# EAGLE board Old Shutters Signal Interface (EAGLE 9.0.0)
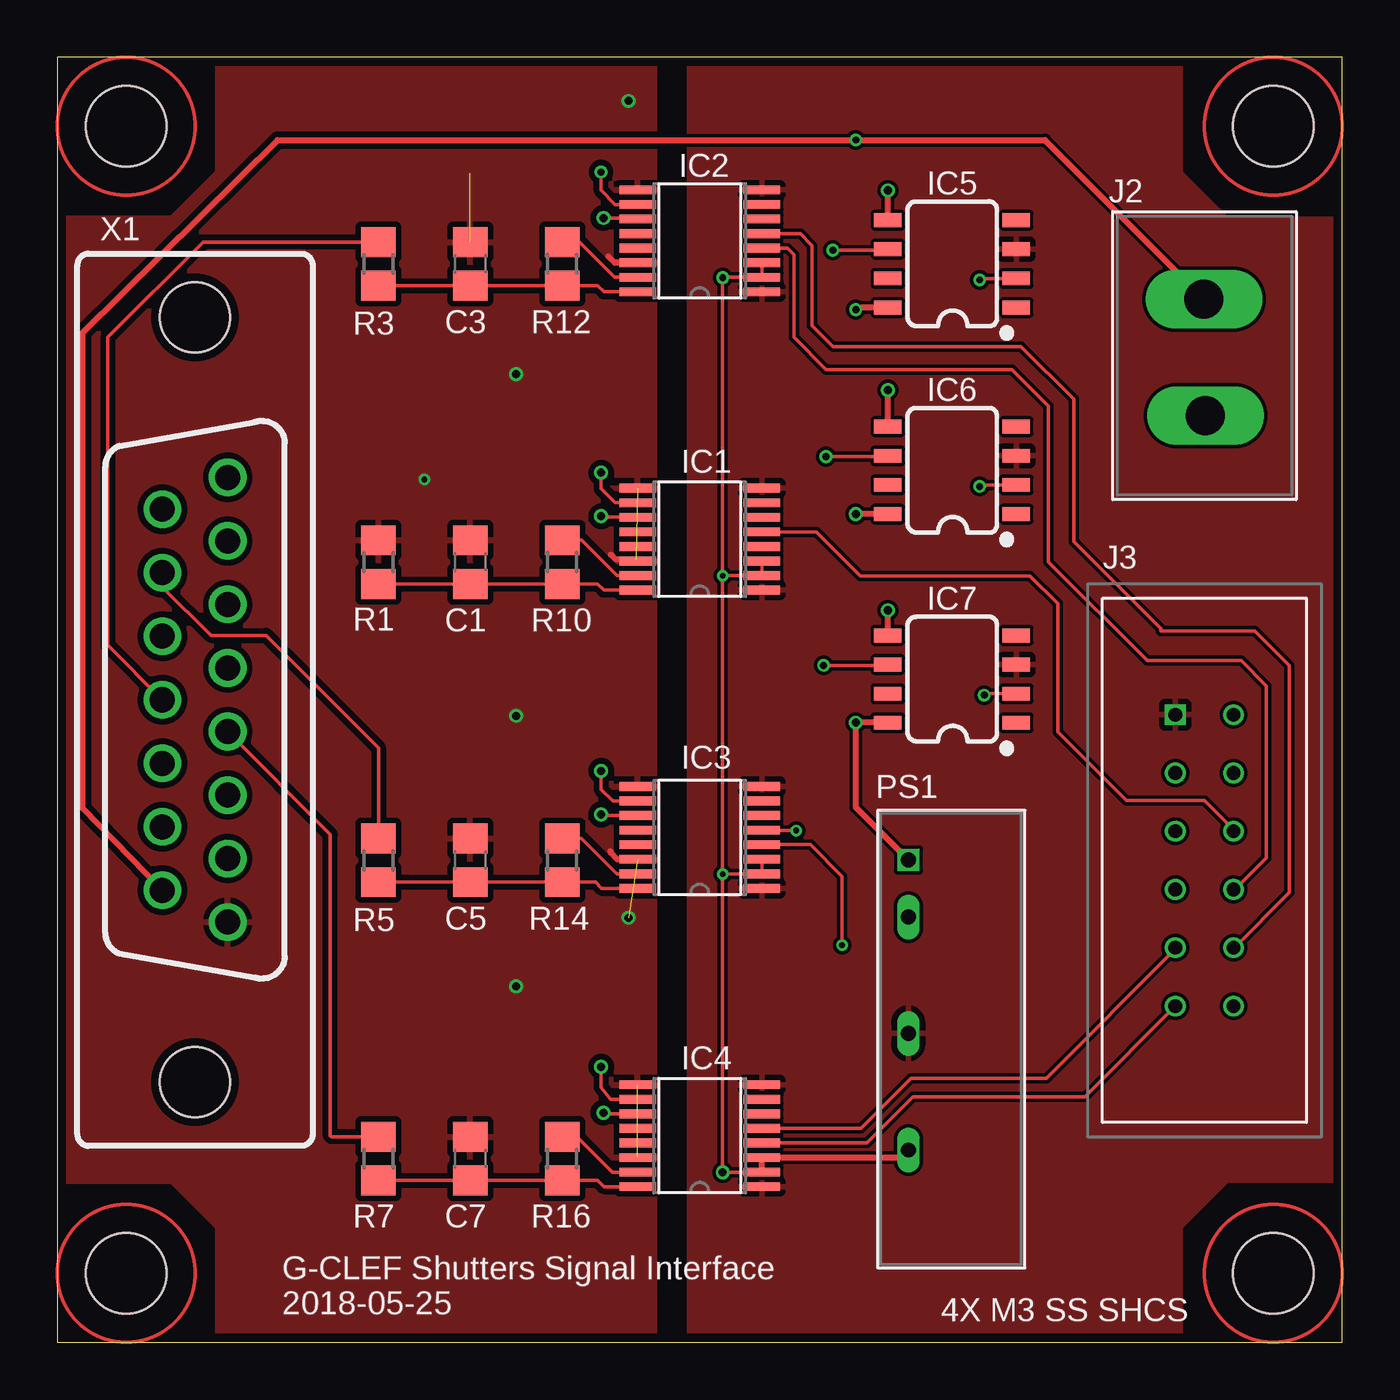
[diagram p0: board, top side]
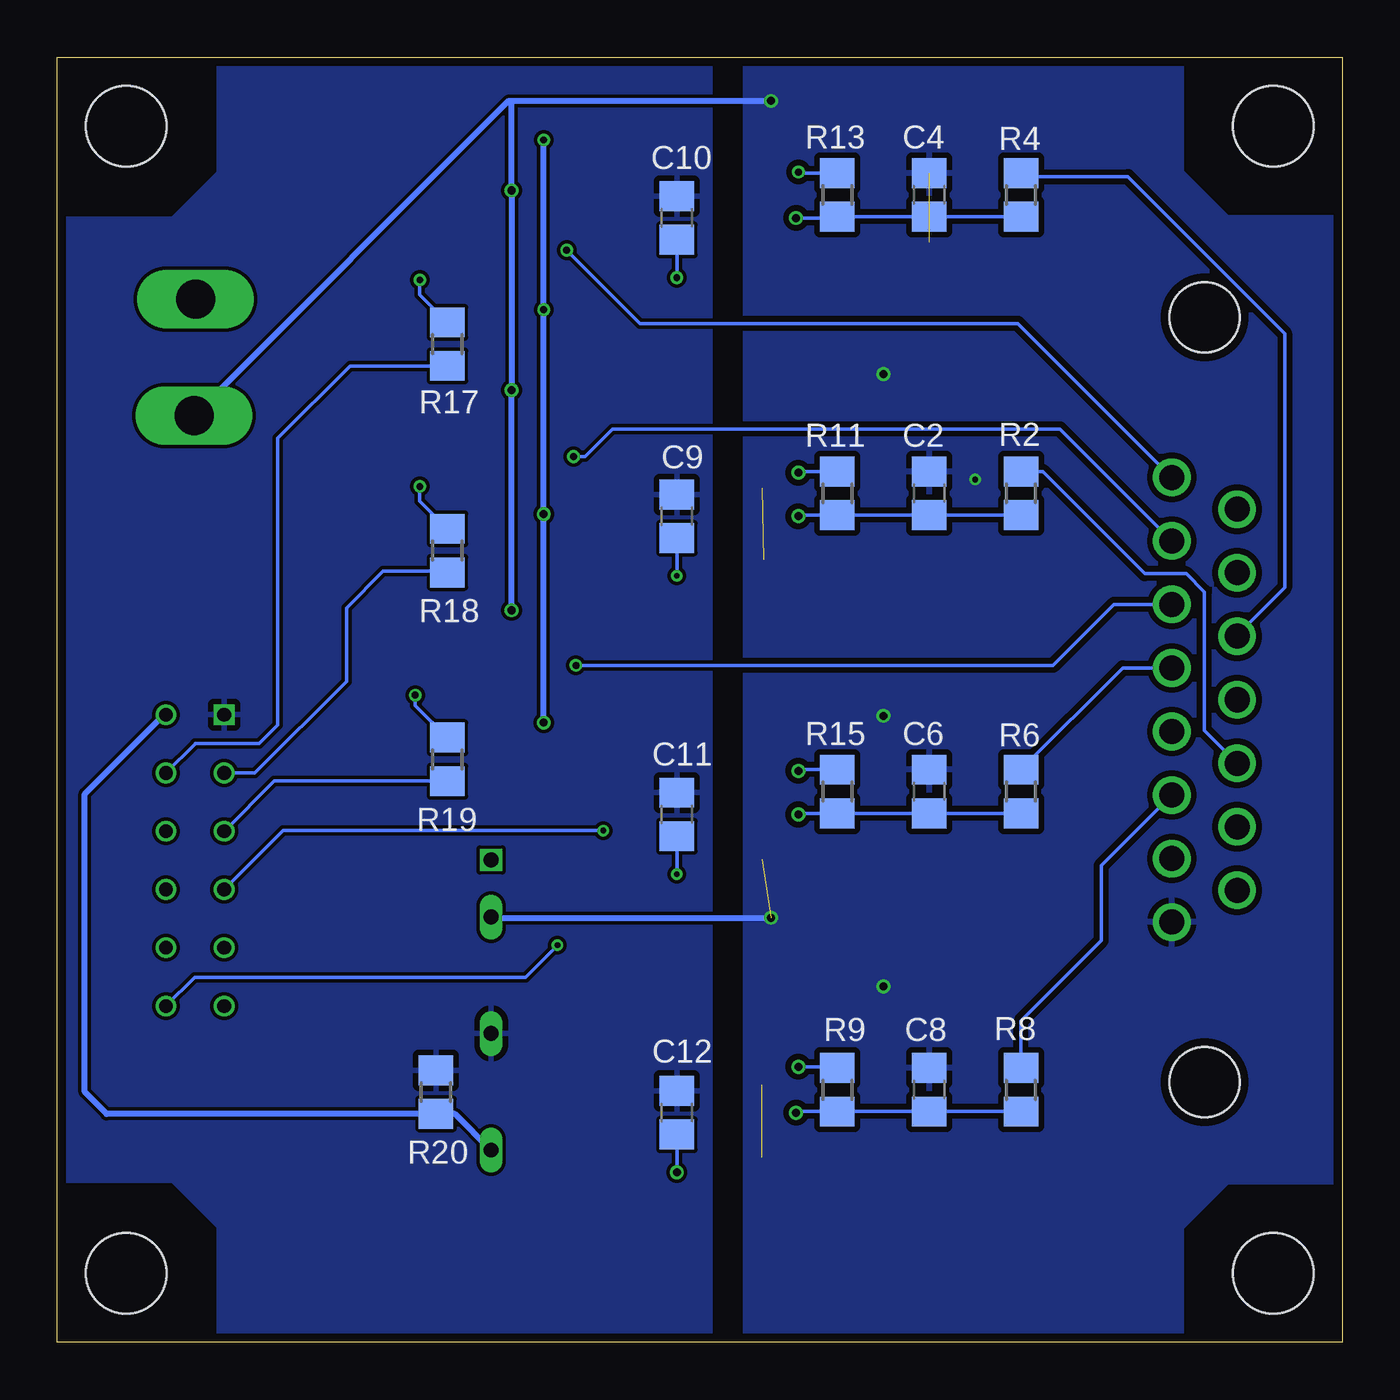
[diagram p1: board, bottom side, seen from below]

Size 56 x 56 mm. Coordinates in mm from the lower left corner, seen from the top.
Outline: 0,0 56,0 56,56 0,56 0,0
Copper layers (1*16): Top 0.035559375mm / dielectric 1.6mm / Bottom 0.035559375mm
Design rules "oshpark-2layer": minimum track width 6mil, minimum drill 10mil, track to track 6mil, track to pad 6mil, pad to pad 6mil, via to via 6mil, smd to smd 6mil, copper to edge 15mil, drill to drill 6mil, minimum pad ring 5mil, minimum via ring 5mil, stop-mask expansion 2.5mil, vias tented up to drill 0mil, thermal gap 10mil
Net classes: 1 pwr: width 0.254 mm, clearance 0.254 mm
Holes 3.5 mm at 3,3 3,53 53,53 53,3

## Footprints (pad centres in the part's own frame; a part is rotated, then mirrored left to right if it is on the bottom)
C0805 = smd 1.3 x 1.5: 1 -0.95,0; 2 0.95,0
ISO1212 = smd 1.6 x 0.381: 1 -2.705,2.223; 2 -2.705,1.587; 3 -2.705,0.953; 4 -2.705,0.318; 5 -2.705,-0.318; 6 -2.705,-0.953; 7 -2.705,-1.587; 8 -2.705,-2.223; 9 2.705,-2.223; 10 2.705,-1.587; 11 2.705,-0.953; 12 2.705,-0.318; 13 2.705,0.318; 14 2.705,0.953; 15 2.705,1.587; 16 2.705,2.223
SO08 = smd 0.6 x 1.2: 1 -1.905,-2.8; 2 -0.635,-2.8; 3 0.635,-2.8; 4 1.905,-2.8; 5 1.905,2.8; 6 0.635,2.8; 7 -0.635,2.8; 8 -1.905,2.8
MSTBVA = drill 1.7 long: 1 -2.61,-0.04; 2 2.47,0.02
SAMTEC12 = drill 0.6 square: 1 -1.27,6.35 | drill 0.6: 2 1.27,6.35; 3 -1.27,3.81; 4 1.27,3.81; 5 -1.27,1.27; 6 1.27,1.27; 7 -1.27,-1.27; 8 1.27,-1.27; 9 -1.27,-3.81; 10 1.27,-3.81; 11 -1.27,-6.35; 12 1.27,-6.35
MER1 = drill 0.65 square: 1 -7.62,-1.905 | drill 0.65 long: 2 -5.131,-1.905; 4 -0.051,-1.905; 6 5.029,-1.905
R0805 = smd 1.3 x 1.5: 1 -0.95,0; 2 0.95,0
H2R15ST = drill 1.092: 1 9.69,1.422; 2 6.921,1.422; 3 4.153,1.422; 4 1.384,1.422; 5 -1.384,1.422; 6 -4.153,1.422; 7 -6.921,1.422; 8 -9.69,1.422; 9 8.306,-1.422; 10 5.537,-1.422; 11 2.769,-1.422; 12 0,-1.422; 13 -2.769,-1.422; 14 -5.537,-1.422; 15 -8.306,-1.422 | hole 3.048: -16.662,0; 16.662,0

## Placement (x,y rotation side)
C1  10nF  [C0805]  18,34 90 top
C2  10nF  [C0805]  18,37 90 bottom
C3  10nF  [C0805]  18,47 90 top
C4  10nF  [C0805]  18,50 90 bottom
C5  10nF  [C0805]  18,21 90 top
C6  10nF  [C0805]  18,24 90 bottom
C7  10nF  [C0805]  18,8 90 top
C8  10nF  [C0805]  18,11 90 bottom
C9  0.1uF  [C0805]  29,36 90 bottom
C10  0.1uF  [C0805]  29,49 90 bottom
C11  0.1uF  [C0805]  29,23 90 bottom
C12  0.1uF  [C0805]  29,10 90 bottom
IC1  ISO1212  [ISO1212]  28,35 180 top
IC2  ISO1212  [ISO1212]  28,48 180 top
IC3  ISO1212  [ISO1212]  28,22 180 top
IC4  ISO1212  [ISO1212]  28,9 180 top
IC5  SI8710  [SO08]  39,47 90 top
IC6  SI8710  [SO08]  39,38 90 top
IC7  SI8710  [SO08]  39,28.9 90 top
J2  MSTBVA  [MSTBVA]  50,43 90 top
J3  SAMTEC12  [SAMTEC12]  50,21 0 top
PS1  MER1S2405SC  [MER1]  39,13.4 270 top
R1  1K  [R0805]  14,34 270 top
R2  1K  [R0805]  14,37 270 bottom
R3  1K  [R0805]  14,47 270 top
R4  1K  [R0805]  14,50 270 bottom
R5  1K  [R0805]  14,21 270 top
R6  1K  [R0805]  14,24 270 bottom
R7  1K  [R0805]  14,8 270 top
R8  1K  [R0805]  14,11 270 bottom
R9  562R  [R0805]  22,11 90 bottom
R10  562R  [R0805]  22,34 90 top
R11  562R  [R0805]  22,37 90 bottom
R12  562R  [R0805]  22,47 90 top
R13  562R  [R0805]  22,50 90 bottom
R14  562R  [R0805]  22,21 90 top
R15  562R  [R0805]  22,24 90 bottom
R16  562R  [R0805]  22,8 90 top
R17  [R0805]  39,43.5 90 bottom
R18  [R0805]  39,34.5 90 bottom
R19  [R0805]  39,25.4 90 bottom
R20  249R  [R0805]  39.5,10.9 90 bottom
X1  D-SUB15-H2R15ST  [H2R15ST]  6,28 270 top

## Library data of the parts
C1-C12 = rcl; SPICEPREFIX: C
IC1-IC7 J2 J3 PS1 = AU
R1-R20 = rcl; SPICEPREFIX: R
X1 = con-thomas-betts; OC_FARNELL: unknown; OC_NEWARK: unknown

## Nets
5V: C9.1 C10.1 C11.1 C12.1 IC1.2 IC1.3 IC2.2 IC2.3 IC3.2 IC3.3 IC4.2 IC4.3 J3.2 PS1.6 R20.1
24V [pwr]: IC5.8 IC6.8 IC7.8 J2.2 PS1.1 X1.9
A$0: R3.1 X1.12
A$1: R4.1 X1.13
A$2: R5.1 X1.14
D$0: R8.1 X1.3
D$1: R7.1 X1.4
D$2: R6.1 X1.5
GND: C9.2 C10.2 C11.2 C12.2 IC1.1 IC1.8 IC2.1 IC2.8 IC3.1 IC3.8 IC4.1 IC4.8 IC5.3 IC6.3 IC7.3 J3.1 PS1.4 R20.2
GND-ISO [pwr]: C1.2 C2.2 C3.2 C4.2 C5.2 C6.2 C7.2 C8.2 IC1.9 IC1.14 IC2.9 IC2.14 IC3.9 IC3.14 IC4.9 IC4.14 IC5.5 IC6.5 IC7.5 J2.1 PS1.2 R1.1 X1.1
N$1: IC5.2 R17.2
N$2: C1.1 IC1.16 R1.2 R10.1
N$3: IC7.6 X1.6
N$4: IC1.15 R10.2
N$5: IC1.10 R11.2
N$6: C2.1 IC1.11 R2.2 R11.1
N$7: IC2.15 R12.2
N$8: C3.1 IC2.16 R3.2 R12.1
N$9: C4.1 IC2.11 R4.2 R13.1
N$10: C5.1 IC3.16 R5.2 R14.1
N$11: C6.1 IC3.11 R6.2 R15.1
N$12: C7.1 IC4.16 R7.2 R16.1
N$13: C8.1 IC4.11 R8.2 R9.1
N$14: IC2.10 R13.2
N$15: IC3.15 R14.2
N$16: IC3.10 R15.2
N$17: IC4.15 R16.2
N$18: IC4.10 R9.2
N$19: IC6.6 X1.7
N$20: IC5.6 X1.8
N$28: IC1.5 J3.6
N$29: IC2.4 J3.8
N$30: IC2.5 J3.10
N$31: IC3.4 J3.12
N$32: IC3.5 J3.7
N$34: IC6.2 R18.2
N$36: IC7.2 R19.2
N$37: IC4.5 J3.9
N$38: IC4.4 J3.11
S$0: J3.5 R19.1
S$1: J3.3 R18.1
S$2: J3.4 R17.1
TRIG: R2.1 X1.11

## Tracks (layer width: path | path; a pad name or v marks a point on that pad's centre or on a via)
5V  (via drill 0.25, 0.3, 0.35)
  Top 0.152: IC4.2 29.01,7.41 v29,7.4 v29,20.4 | IC3.3 IC3.2 30.69,20.4 v29,20.4 | IC1.3 IC1.2 29.01,33.41 v29,33.4 | v29,20.4 v29,33.4 | v29,33.4 v29,46.4 29.01,46.41 IC2.2 IC2.3
  Top 0.254: IC4.2 IC4.3 36.77,8.05 PS1.6
  Bottom 0.152: v29,7.4 C12.1 | v29,20.4 C11.1 | v29,33.4 C9.1 | v29,46.4 C10.1
  Bottom 0.254: PS1.6 38.67,9.95 R20.1 53.85,9.95 54.8,10.9 54.8,23.9 51.35,27.35 J3.2
24V  (via drill 0.3, 0.35)
  Top 0.254: X1.9 1.1,23.27 1.1,44 9.6,52.4 v34.8,52.4 43.05,52.4 J2.2 | PS1.1 34.8,23.32 v34.8,27 IC7.8 | IC6.8 v34.8,36.1 | IC5.8 34.9,45.09 v34.8,45
  Bottom 0.254: v34.8,27 v34.8,36.1 v34.8,45 v34.8,52.4
A$0
  Top 0.152: R3.1 6.35,47.95 2.2,43.8 2.2,30.38 X1.12
A$1
  Bottom 0.152: R4.1 13.85,50.8 9.34,50.8 2.5,43.96 2.5,32.9 4.58,30.82 X1.13
A$2
  Top 0.152: X1.14 4.58,32.92 6.7,30.8 9.1,30.8 14,25.9 R5.1
D$0
  Bottom 0.152: R8.1 14,14 10.5,17.5 10.5,20.77 X1.3
D$1
  Top 0.152: R7.1 11.95,8.95 11.9,9 11.9,22.14 X1.4
D$2
  Bottom 0.152: R6.1 9.57,29.38 X1.5
GND
  pour Top: 27.5,0 49,0 49,5 51,7 56,7 56,49 51,49 49,51 49,56 27.5,56
  pour Bottom: 27.5,0 49,0 49,5 51,7 56,7 56,49 51,49 49,51 49,56 27.5,56
GND-ISO  (via drill 0.25, 0.35)  (4 unrouted)
  Top 0.254: IC5.5 v36.2,50.2 | IC6.5 v36.2,41.5 | IC7.5 v36.2,31.9 | IC2.14 24.3,47.05 24.02,47.32 | 24.1,21.4 24.11,21.39 24.11,21.33 24.4,21.05 IC3.14 | IC1.14 25.23,34.11 24.34,34.11 24.12,34.32
  Bottom 0.254: PS1.2 37.06,18.5 v24.9,18.5 | v36.2,31.9 v36.2,41.5 v36.2,50.2 36.2,54.1 | J2.1 36.33,54.1 36.2,54.1 | 36.2,54.1 v24.9,54.1
  other vias: 20,15.5 20,27.3 20,42.2 16,37.6
  pour Bottom: 7,5 5,7 0,7 0,49 5,49 7,51 7,56 26,56 26,0 7,0
  pour Top: 7,5 5,7 0,7 0,49 5,49 7,51 7,56 26,56 26,0 7,0
N$1  (via drill 0.3)
  Top 0.152: v40.2,46.3 40.27,46.37 IC5.2
  Bottom 0.152: R17.2 40.2,45.65 v40.2,46.3
N$2
  Top 0.152: R1.2 C1.1 R10.1 23.55,33.05 23.82,32.78 IC1.16
N$3  (via drill 0.3)
  Top 0.152: v33.4,29.5 36.16,29.5 IC7.6
  Bottom 0.152: X1.6 9.95,32.15 12.6,29.5 v33.4,29.5
N$4
  Top 0.152: IC1.15 24.39,33.41 22.85,34.95 R10.2
N$5  (via drill 0.35)
  Top 0.152: v23.7,37.9 23.7,37.2 24.31,36.59 IC1.10
  Bottom 0.152: R11.2 23.65,37.95 v23.7,37.9
N$6  (via drill 0.35)
  Top 0.152: v23.7,36 23.75,35.95 IC1.11
  Bottom 0.152: R2.2 C2.1 R11.1 23.65,36.05 v23.7,36
N$7
  Top 0.152: IC2.15 24.29,46.41 22.75,47.95 R12.2
N$8
  Top 0.152: R3.2 C3.1 R12.1 23.55,46.05 23.82,45.78 IC2.16
N$9  (via drill 0.35)
  Top 0.152: v23.8,49 25.25,49 IC2.11
  Bottom 0.152: R4.2 C4.1 R13.1 22.05,49 v23.8,49
N$10
  Top 0.152: R5.2 C5.1 R14.1 23.45,20.05 23.72,19.78 IC3.16
N$11  (via drill 0.35)
  Top 0.152: v23.7,23 23.75,22.95 IC3.11
  Bottom 0.152: R6.2 C6.1 R15.1 23.65,23.05 v23.7,23
N$12
  Top 0.152: R7.2 C7.1 R16.1 23.55,7.05 23.82,6.78 IC4.16
N$13  (via drill 0.35)
  Top 0.152: v23.8,10 23.85,9.95 IC4.11
  Bottom 0.152: R8.2 C8.1 R9.1 23.75,10.05 v23.8,10
N$14  (via drill 0.3)
  Top 0.152: IC2.10 24.31,49.59 23.7,50.2 v23.7,51
  Bottom 0.152: v23.7,51 23.65,50.95 R13.2
N$15
  Top 0.152: IC3.15 24.39,20.41 22.85,21.95 R14.2
N$16  (via drill 0.35)
  Top 0.152: v23.7,24.9 23.7,24.1 24.21,23.59 IC3.10
  Bottom 0.152: R15.2 23.65,24.95 v23.7,24.9
N$17
  Top 0.152: R16.2 22.65,8.95 24.2,7.4 IC4.15
N$18  (via drill 0.35)
  Top 0.152: v23.7,12 23.7,11.1 24.11,10.59 IC4.10
  Bottom 0.152: R9.2 22.05,12 v23.7,12
N$19  (via drill 0.3)
  Top 0.152: v33.5,38.6 36.16,38.6 IC6.6
  Bottom 0.152: X1.7 12.3,39.8 31.8,39.8 33,38.6 v33.5,38.6
N$20  (via drill 0.3)
  Top 0.152: v33.8,47.6 36.16,47.6 IC5.6
  Bottom 0.152: X1.8 14.13,44.4 30.6,44.4 v33.8,47.6
N$28
  Top 0.152: IC1.5 33.08,35.32 35,33.4 42.4,33.4 43.6,32.2 43.6,26.6 46.6,23.6 50,23.6 51.27,22.33 J3.6
N$29
  Top 0.152: IC2.4 31.82,47.68 32.1,47.4 32.1,43.8 33.5,42.4 41.6,42.4 43.2,40.8 43.2,34 47.5,29.7 51.6,29.7 52.7,28.6 52.7,21.1 51.33,19.73 J3.8
N$30
  Top 0.152: 30.72,48.3 IC2.5 32.38,48.32 32.9,47.8 32.9,44.3 33.8,43.4 42,43.4 44.3,41.1 44.3,34.9 48.1,31.1 48.1,31 52.2,31 53.7,29.5 53.7,19.6 51.29,17.19 J3.10
N$31  (via drill 0.25)
  Top 0.152: v34.2,17.3 34.2,20.3 32.82,21.68 IC3.4
  Bottom 0.152: J3.12 50.02,15.9 35.6,15.9 v34.2,17.3
N$32  (via drill 0.25)
  Top 0.152: v32.2,22.3 30.72,22.3 IC3.5
  Bottom 0.152: J3.7 46.16,22.3 v32.2,22.3
N$34  (via drill 0.3)
  Top 0.152: v40.2,37.3 40.27,37.37 IC6.2
  Bottom 0.152: R18.2 40.2,36.65 v40.2,37.3
N$36  (via drill 0.3)
  Top 0.152: v40.4,28.2 40.47,28.27 IC7.2
  Bottom 0.152: R19.2 40.4,27.75 v40.4,28.2
N$37
  Top 0.152: IC4.5 35.02,9.32 37.2,11.5 43.1,11.5 48.73,17.13 J3.9
N$38
  Top 0.152: IC4.4 35.28,8.68 37.3,10.7 44.78,10.7 J3.11
S$0
  Bottom 0.152: J3.5 46.55,24.45 R19.1
S$1
  Bottom 0.152: J3.3 47.39,24.81 43.4,28.8 43.4,32 41.8,33.6 39.05,33.6 R18.1
S$2
  Bottom 0.152: J3.4 50,26.08 50,26.1 47.2,26.1 46.4,26.9 46.4,39.4 43.25,42.55 R17.1
TRIG
  Bottom 0.152: X1.11 6,26.65 6,32.7 6.8,33.5 8.6,33.5 13.05,37.95 R2.1
(copper drawn outside any net)
  shapes: Top circle x4

## Text on the board
tPlace: G-CLEF Shutters Signal Interface / 2018-05-25 | 4X M3 SS SHCS